# Altium PCB PCB_Rev4.PcbDoc
Units mm, origin at the board's own origin, x right, y up, seen from the top; angles counter-clockwise.
Board outline 39.12 x 29.21 mm, 2 copper layers (Top Layer, Bottom Layer); 64 components, 50 nets, 259 pads, 131 vias.
Unrouted connection lines stored in the file: 37.
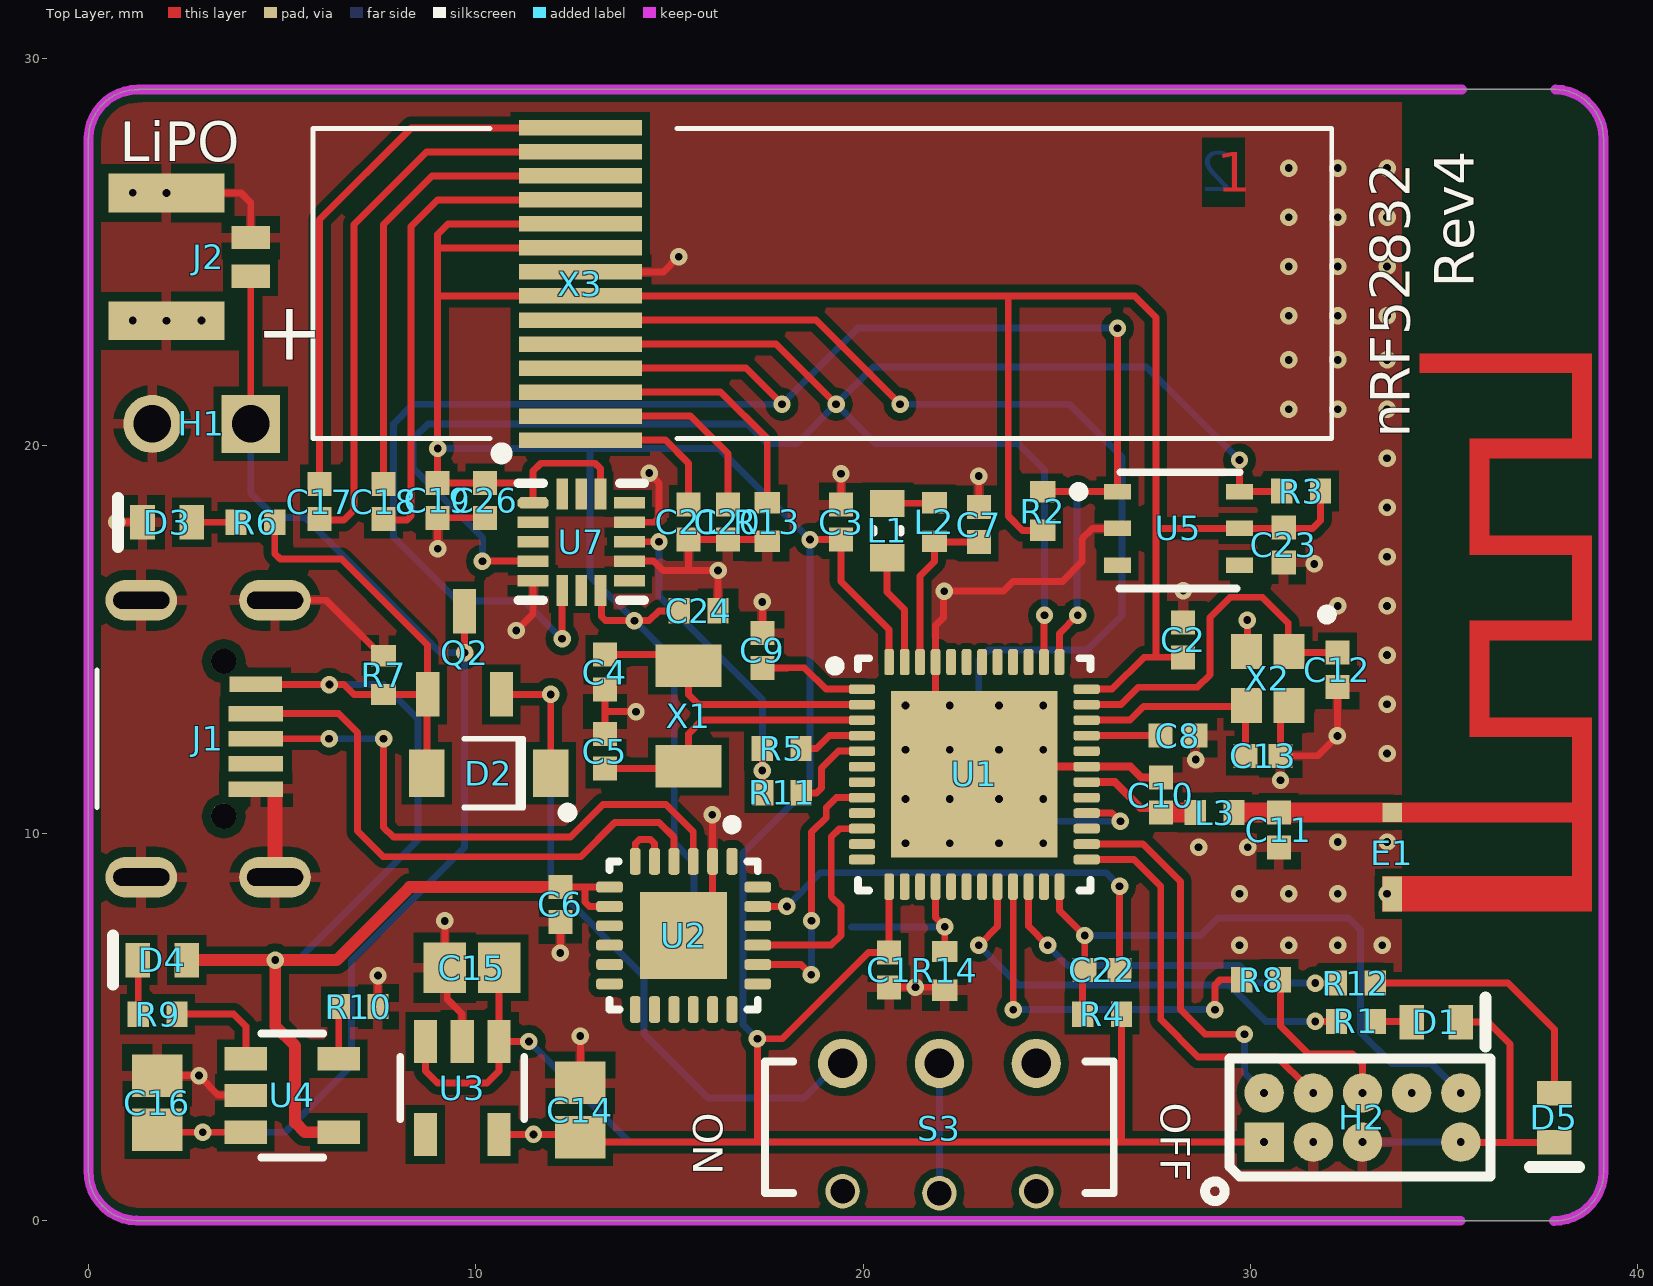
[diagram p0: Top Layer view]
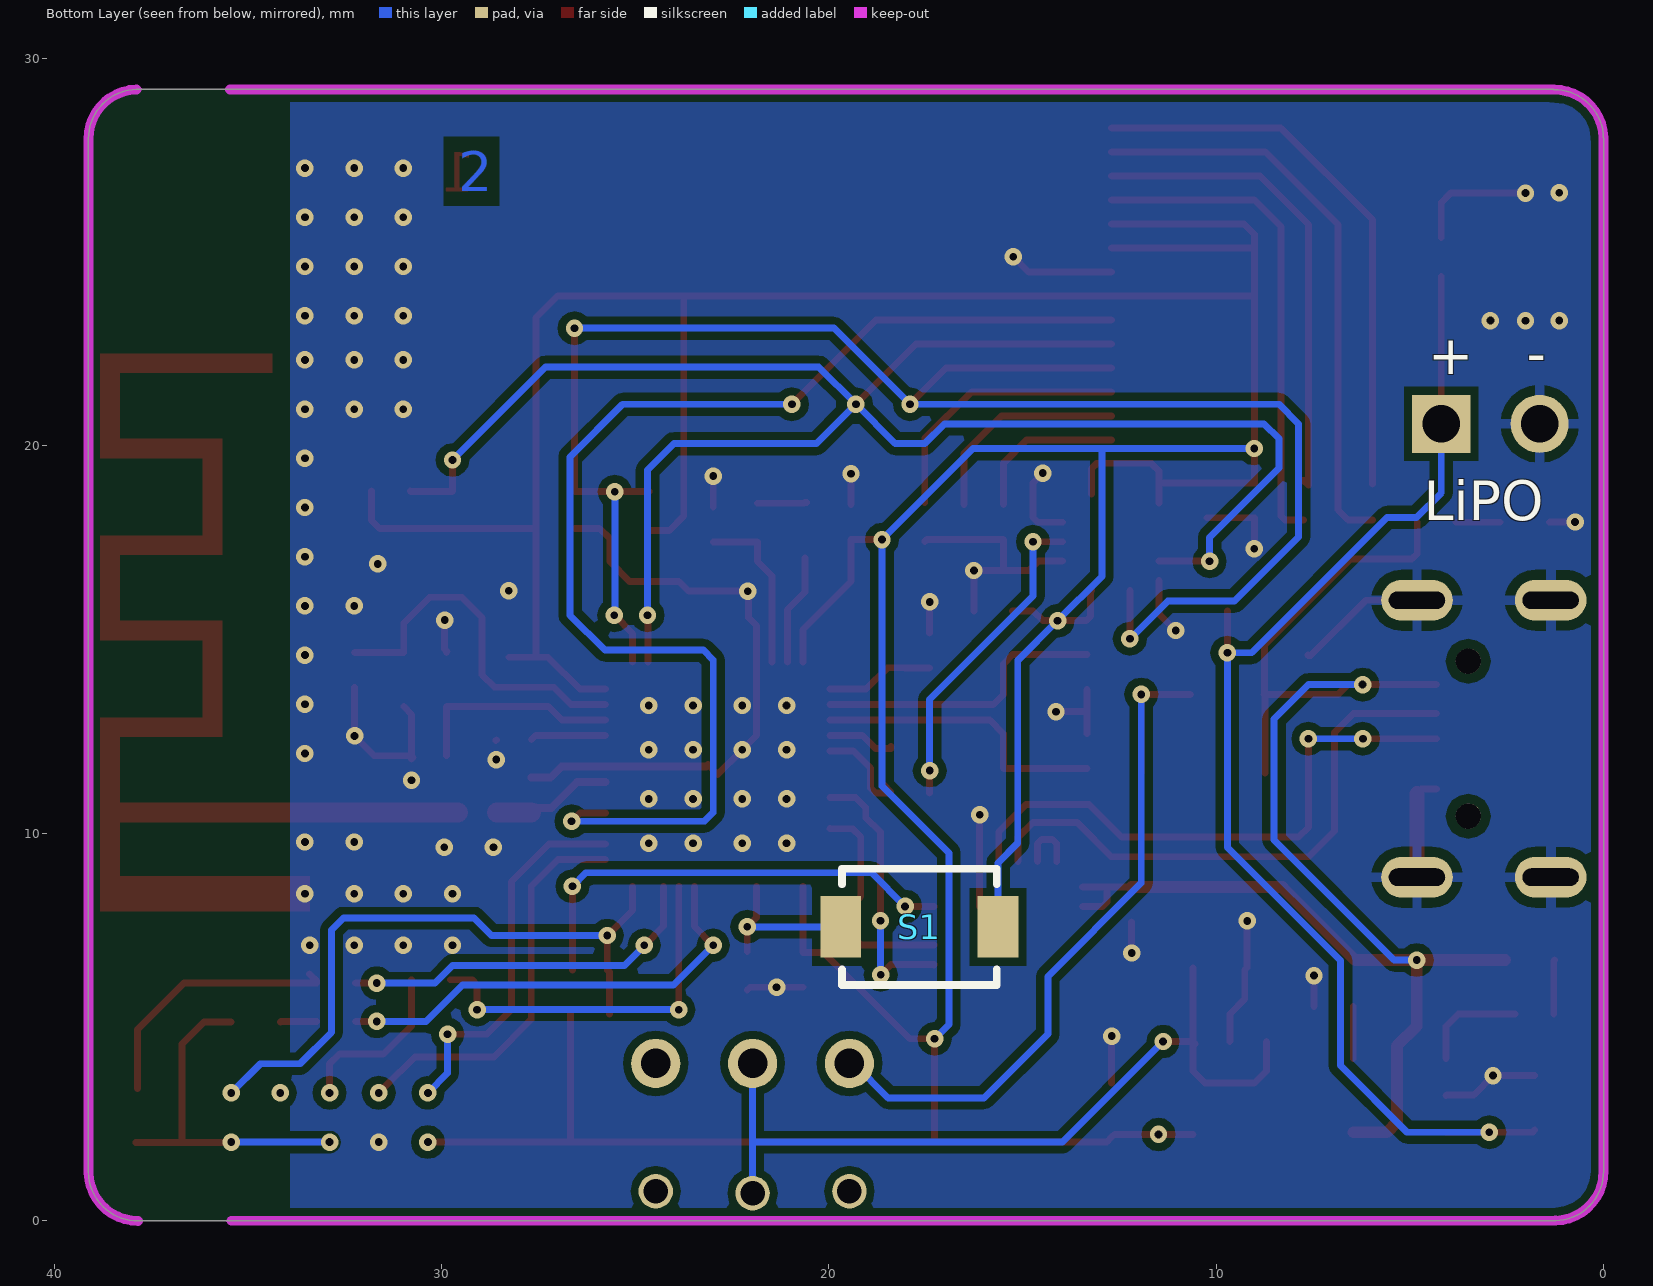
[diagram p1: Bottom Layer view, seen from below]
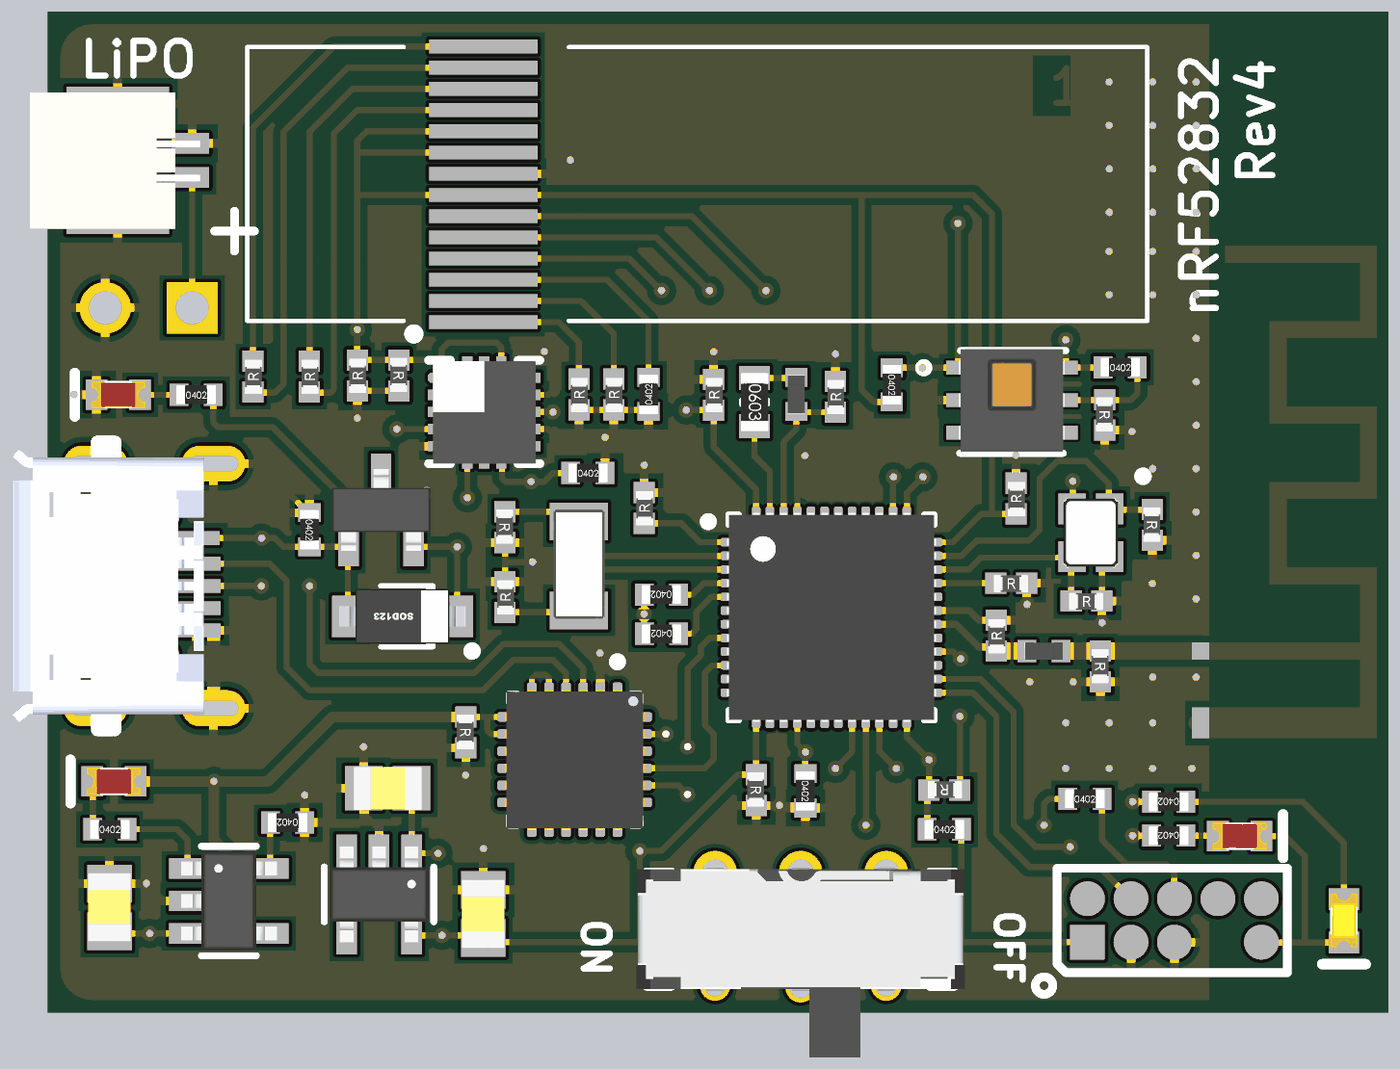
[diagram p2: 3D render of the assembled board from above, using the file's embedded part models]

## Layer stack, top to bottom
Top Solder: solder mask 0.0102, Solder Resist, Dk 3.5
Top Layer: signal copper 0.0356
Dielectric 1: dielectric 0.32, FR-4, Dk 4.8
Bottom Layer: signal copper 0.0356
Bottom Solder: solder mask 0.0102, Solder Resist, Dk 3.5

## Board outline
1.239,0 cw(c1.27,1.27) 0,1.279 0,27.96 0.003,27.96 cw(c1.273,27.93) 1.283,29.199 1.283,29.207 37.877,29.207 37.879,29.207 cw(c37.848,27.937) 39.118,27.927 39.116,27.927 39.116,1.234 cw(c37.846,1.265) 37.837,-0.005 37.834,-0.003

## Design rules (kind name [scope] priority, off if disabled: settings)
Clearance Clearance_U7 [InComponent('U7')] p1: gap=0.191 ignorepadtopadclearanceinfootprint=FALSE
Clearance Clearance_X3 [All vs InComponent('X3')] p2: gap=0.216 ignorepadtopadclearanceinfootprint=FALSE
Clearance Clearance_J1 [All vs InComponent('J1')] p3: gap=0.241 ignorepadtopadclearanceinfootprint=FALSE
Clearance Clearance_U2 [All vs InComponent('U2')] p4: gap=0.203 ignorepadtopadclearanceinfootprint=FALSE
Clearance Clearance_U1 [All vs InComponent('U1')] p5: gap=0.147 ignorepadtopadclearanceinfootprint=FALSE
Clearance [All] p6: gap=0.203 ignorepadtopadclearanceinfootprint=FALSE
MinimumSolderMaskSliver [All] p1: minsoldermaskwidth=0.013
PolygonConnect PolygonConnect_Via [All vs IsVia] p1: connectstyle=Direct reliefconductorwidth=0.254 reliefentries=4 polygonreliefangle="90 Angle" airgapwidth=0.254
PolygonConnect [All] p2: connectstyle=Relief reliefconductorwidth=0.254 reliefentries=4 polygonreliefangle="90 Angle" airgapwidth=0.254
RoutingVias [All] p1: holewidth=0.711 width=1.27 viastyle="Through Hole" minholewidth=0.711 minwidth=1.27 maxholewidth=0.711 maxwidth=1.27
SilkToSilkClearance [All] p1: silktosilkclearance=0.127
SilkToSolderMaskClearance [IsPad] p1: minsilkscreentomaskgap=0.127 clearancetoexposedcopper=TRUE
SolderMaskExpansion [All] p1: expansion=0.102 istentingtop=FALSE
Width [All] p1: maxlimit=2.54 minlimit=0.178 preferedwidth=0.178
27 further rules are at their usual default settings.

## Components (designator, comment, footprint, x,y, rotation, side; value= is the part's Value field where it differs from the comment)
C1 "0.1uF" CAPC1005X56N 20.672,6.476 r270 top
C2 "0.1uF" CAPC1005X56N 28.265,14.996 r90 top
C3 "4.7uF" CAPC1005X56N 19.431,18.035 r90 top
C4 "12pF" CAPC1005X56N 13.335,14.163 r270 top
C5 "12pF" CAPC1005X56N 13.335,12.12 r90 top
C6 "0.1uF" CAPC1005X56N 12.184,8.163 r270 top
C7 "1uF" CAPC1005X56N 22.987,17.973 r90 top
C8 "100pF" CAPC1005X56N 28.127,12.523 r0 top
C9 "0.1uF" CAPC1005X56N 17.399,14.723 r90 top
C10 "0.8pF" CAPC1005X56N 27.686,10.988 r90 top
C11 "DNP" CAPC1005X56N 30.734,10.088 r270 top
C12 "12pF" CAPC1005X56N 32.246,14.223 r270 top
C13 "12pF" CAPC1005X56N 30.326,12.003 r0 top
C14 "10uF" CAPC2012X140N 12.7,2.856 r90 top
C15 "10uF" CAPC2012X140N 9.902,6.531 r180 top
C16 "10uF" CAPC2012X140N 1.778,3.045 r90 top
C17 "1uF" CAPC1005X56N 5.969,18.564 r90 top
C18 "1uF" CAPC1005X56N 7.62,18.564 r90 top
C19 "1uF" CAPC1005X56N 9.017,18.597 r90 top
C20 "4.7uF" CAPC1005X56N 16.51,18.038 r90 top
C21 "2.2uF" CAPC1005X56N 15.494,18.038 r90 top
C22 "0.1uF" CAPC1005X56N 26.172,6.474 r180 top
C23 "0.1uF" CAPC1005X56N 30.861,17.444 r270 top
C24 "0.1uF" RESC1005X40L 15.756,15.745 r0 top
C26 "0.1uF" CAPC1005X56N 10.236,18.597 r270 top
D1 "Red Led" LED1608X55N-RED 34.798,5.127 r180 top
D2 "MBR0520-TP" SOD123 10.338,11.554 r180 top value=MBR0520
D3 "Green Led" LED1608X55N-RED 2.032,18.031 r0 top
D4 "Red Led" LED1608X55N-RED 1.905,6.728 r0 top
D5 "Orange Led" LED1608X55N-YELLOW 37.846,2.654 r90 top
E1 "ANT" TRACE_ANTENNA_2.4GHZ_15.2MM 33.909,10.538 r90 top
H1 "CON2" HDR1X2-EMPTY 2.921,20.571 r180 top
H2 "CON5X2-50MIL" HDR5X2-50MIL-SMT 32.893,2.664 r0 top
J1 "Micro USB" U254-051N-4BH806 4.318,12.443 r270 top
J2 "CON2" JST_Micro_2PIN 4.191,24.881 r270 top
L1 "10uH" RESC1608X06L 20.625,17.816 r270 top
L2 "15nH" INDC1005X40L 21.844,18.039 r270 top
L3 "3.9nH" INDC1005X40L 29.075,10.538 r0 top
Q2 "FDN340P" SOT95P240X110-3N 9.713,14.661 r90 top value="Mosfet P-CH"
R1 "1K" RESC1005X40L 32.723,5.144 r180 top
R2 "2K" RESC1005X40L 24.638,18.321 r270 top
R3 "2K" RESC1005X40L 31.31,18.834 r0 top
R4 "10K" RESC1005X40L 26.17,5.331 r0 top
R5 "0R" RESC1005X40L 17.899,12.189 r180 top
R6 "22K" RESC1005X40L 4.31,18.031 r0 top
R7 "100K" RESC1005X40L 7.62,14.086 r270 top
R8 "0R" RESC1005X40L 30.274,6.22 r0 top
R9 "2K" RESC1005X40L 1.786,5.331 r0 top
R10 "4K" RESC1005X40L 6.977,5.527 r180 top
R11 "0R" RESC1005X40L 17.907,11.046 r180 top
R12 "1K" RESC1005X40L 32.723,6.134 r180 top
R13 "390K" RESC1005X40L 17.526,18.039 r90 top
R14 "10K" RESC1005X40L 22.11,6.451 r270 top
S1 "Pushbutton" TL1015AF160QG 17.665,7.586 r0 bottom
S3 "SWITCH SLIDE" SK-3245D-02-L4 21.971,2.41 r0 top
U1 "NRF52832-QFAA-R" QFN48_NEW 22.872,11.523 r0 top value=nRF52832
U2 "CP2104N" 24-QFN 15.367,7.363 r270 top
U3 "HT7833" SOT95P280X144-5N 9.652,3.426 r270 top
U4 "SL4054ST25P" SOT95P280X144-5N 5.264,3.233 r0 top
U5 "HDC1080DMBT" HDC1080 28.143,17.871 r0 top value=Humidity/Temperature
U7 "LIS3DHTR" QFN3X3_16_1.2 12.725,17.516 r0 top
X1 "32Khz" ECS-.327-12.5-34B 15.494,13.078 r270 top
X2 "32 Mhz" OSC20X16 30.45,13.998 r270 top
X3 "OLED_GLASS 96x16" "OLED_GLASS 96x16" 5.8,20.193 r180 top locked

## Footprints (in the part's own frame and the unit in brackets; to place one, negate y for a bottom-side part, rotate by r counter-clockwise, add the part's x,y. Pads: shape width x height; smd on the part's side, far side on the other; paste and mask are expansions set on the pad)
24-QFN [mm] "24-QFN Exposed Pad (4x4)"
  rrect50% 0.69x0.28 smd: 1(-1.912,1.25) 2(-1.912,0.75) 3(-1.912,0.25) 4(-1.912,-0.25) 5(-1.912,-0.75) 6(-1.912,-1.25) 13(1.913,-1.25) 14(1.913,-0.75) 15(1.913,-0.25) 16(1.913,0.25) 17(1.913,0.75) 18(1.913,1.25)
  rrect50% 0.28x0.69 smd: 7(-1.25,-1.913) 8(-0.75,-1.913) 9(-0.25,-1.913) 10(0.25,-1.913) 11(0.75,-1.913) 12(1.25,-1.913) 19(1.25,1.913) 20(0.75,1.913) 21(0.25,1.913) 22(-0.25,1.913) 23(-0.75,1.913) 24(-1.25,1.913)
  rect 2.25x2.25 smd paste-1.3: 25(0,0)
  silkscreen extent -2.99,-1.91 1.91,1.91, body extent -2.05,-2.04 2.05,2.06, height 1.08
CAPC1005X56N [mm] "Chip Capacitor, 2-Leads, Body 1.0x0.5mm, IPC Medium Density (0402 ceramic)"
  rect 0.62x0.62 smd: 1(-0.45,0) 2(0.45,0)
  body extent -0.55,-0.3 0.55,0.3, height 0.6
CAPC2012X140N [mm] "Chip Capacitor, 2-Leads, Body 2.0x1.3mm, IPC Medium Density (0805 ceramic)"
  rect 1.1x1.3 smd: 1(-0.7,0) 2(0.7,0)
  body extent -1,-0.62 1,0.63, height 1.24
ECS-.327-12.5-34B [mm] "SMT Crystal, 2-Leads, Body 3.2x1.5mm, IPC Medium Density"
  rect 1.1x1.7 smd: 1(-1.25,0) 2(1.35,0)
  body extent -1.6,-0.75 1.6,0.75, height 0.91
HDC1080 [mm] "Temp/Humidity Sensor"
  rect 0.7x0.4 smd mask+0.076: 1(-1.575,0.95) 2(-1.575,0) 3(-1.575,-0.95) 5(1.575,0) 6(1.575,0.95)
  rect 0.7x0.4 smd paste+0 mask+0.076: 4(1.575,-0.95)
  silkscreen extent -2.7,-1.55 1.57,1.45, body extent -1.55,-1.5 1.55,1.5, height 0.85
HDR1X2-EMPTY [mm]
  rect 1.5x1.5 hole 0.965: 1(-1.27,0)
  round 1.5 hole 0.965: 2(1.27,0)
HDR5X2-50MIL-SMT [mil]
  rect 40x40 smd: 1(-100,-25)
  round 40 smd: 2(-100,25) 3(-50,-25) 4(-50,25) 5(0,-25) 6(0,25) 8(50,25) 9(100,-25) 10(100,25)
  silkscreen extent -160,-85 130,60
INDC1005X40L [mm] "Chip Inductor, 2-Leads, Body 1.0x0.5mm, IPC Medium Density (0402)"
  rect 0.55x0.65 smd: 1(-0.5,0) 2(0.5,0)
  body extent -0.56,-0.26 0.56,0.26, height 0.65
JST_Micro_2PIN [mm]
  rect 0.6x1 smd: 1(0.5,0) 2(-0.5,0)
  rect 1x3 smd: ""(-1.65,-2.175) ""(1.65,-2.175)
  body extent -1.99,-4.74 2,0.24, height 2.9
LED1608X55N-RED [mil] "Chip LED RED, 2-Leads, Body 1.6x0.8mm, IPC Medium Density (0603 med)"
  rect 25x35 smd: 1(-25,0) 2(25,0)
  silkscreen extent -50,-25 -50,25, body extent -31,-16 31,16, height 24
LED1608X55N-YELLOW [mil] "Chip LED YELLOW, 2-Leads, Body 1.6x0.8mm, IPC Medium Density (0603 med)"
  rect 25x35 smd: 1(-25,0) 2(25,0)
  silkscreen extent -50,-25 -50,25, body extent -31,-16 32,16, height 24
"OLED_GLASS 96x16" [mm] "OLED_GLASS 96x16"
  rect 3.175x0.4 smd: 1(-6.9,-8.02) 2(-6.9,-7.4) 3(-6.9,-6.78) 4(-6.9,-6.16) 5(-6.9,-5.54) 6(-6.9,-4.92) 7(-6.9,-4.3) 8(-6.9,-3.68) 9(-6.9,-3.06) 10(-6.9,-2.44) 11(-6.9,-1.82) 12(-6.9,-1.2) 13(-6.9,-0.58) 14(-6.9,0.04)
  silkscreen extent -26.3,-8 0,0, body extent -26.3,-8 0,0, height 2
OSC20X16 [mm] "Crystal 2.0mm x 1.60mm 0.5mm height"
  rect 0.9x0.8 smd: 1(-0.7,0.55) 2(-0.7,-0.55) 3(0.7,-0.55) 4(0.7,0.55)
  silkscreen extent -1.78,1.39 -1.52,1.65, body extent -1.02,-0.82 1.03,0.83, height 0.4
QFN3X3_16_1.2 [mm] "QFN3X3_16_1.2"
  oct 0.8x0.3 smd: 1(-1.245,1.016)
  rect 0.8x0.3 smd: 2(-1.245,0.514) 3(-1.245,0.013) 4(-1.245,-0.489) 5(-1.245,-0.991) 9(1.245,-0.991) 10(1.245,-0.489) 11(1.245,0.013) 12(1.245,0.514) 13(1.245,1.016)
  rect 0.3x0.8 smd: 6(-0.495,-1.245) 7(0,-1.245) 8(0.495,-1.245) 14(0.495,1.245) 15(0,1.245) 16(-0.495,1.245)
  silkscreen extent -2.19,-1.5 1.63,2.42, body extent -1.51,-1.5 1.51,1.5, height 0.81
QFN48_NEW [mm] "QFN, 48-Leads, Body 7x7mm, Pitch 0.5mm, IPC Medium Density"
  rrect50% 0.68x0.25 smd: 1(-2.9,2.2) 2(-2.9,1.8) 3(-2.9,1.4) 4(-2.9,1) 5(-2.9,0.6) 6(-2.9,0.2) 7(-2.9,-0.2) 8(-2.9,-0.6) 9(-2.9,-1) 10(-2.9,-1.4) 11(-2.9,-1.8) 12(-2.9,-2.2) 25(2.9,-2.2) 26(2.9,-1.8) 27(2.9,-1.4) 28(2.9,-1) 29(2.9,-0.6) 30(2.9,-0.2) 31(2.9,0.2) 32(2.9,0.6) 33(2.9,1) 34(2.9,1.4) 35(2.9,1.8) 36(2.9,2.2)
  rrect50% 0.25x0.68 smd: 13(-2.2,-2.9) 14(-1.8,-2.9) 15(-1.4,-2.9) 16(-1,-2.9) 17(-0.6,-2.9) 18(-0.2,-2.9) 19(0.2,-2.9) 20(0.6,-2.9) 21(1,-2.9) 22(1.4,-2.9) 23(1.8,-2.9) 24(2.2,-2.9) 37(2.2,2.9) 38(1.8,2.9) 39(1.4,2.9) 40(1,2.9) 41(0.6,2.9) 42(0.2,2.9) 43(-0.2,2.9) 44(-0.6,2.9) 45(-1,2.9) 46(-1.4,2.9) 47(-1.8,2.9) 48(-2.2,2.9)
  rect 4.3x4.3 smd: 49(0,0)
  silkscreen extent -3.72,-3 3,3, body extent -3.05,-3.05 3.05,3.05, height 0.9
RESC1005X40L [mm] "Chip Resistor, 2-Leads, Body 1.0x0.5mm, IPC Medium Density (0402)"
  rect 0.55x0.65 smd: 1(-0.5,0) 2(0.5,0)
  body extent -0.57,-0.27 0.58,0.28, height 0.41
RESC1608X06L [mm] "Chip Resistor, 2-Leads, Body 1.6x0.8mm, IPC High Density (0603 dense)"
  rect 0.7x0.9 smd: 1(-0.7,0) 2(0.7,0)
  silkscreen extent -0.05,-0.35 0.05,0.35, body extent -0.85,-0.4 0.85,0.4, height 0.56
SK-3245D-02-L4 [mm] "Toggle Switches Through Hole"
  round 0.889 hole 0.635: 1(-2.5,-1.65) 2(0,-1.7) 3(2.5,-1.65)
  round 1.27 hole 0.762: 1(-2.5,1.65) 2(0,1.65) 3(2.5,1.65)
  silkscreen extent -4.5,-1.7 4.5,1.7, body extent -4.8,-3.75 4.8,1.8, height 3.56
SOD123 [mil] "Molded Diode, 2-Leads, Body 2.85x1.8mm, IPC Medium Density (SOD123)"
  rect 36x48 smd: 1(-63,0) 2(63,0)
  silkscreen extent -85,-35 25,45, body extent -73,-31 73,31, height 50
SOT95P240X110-3N [mm] "SOT23, 3-Leads, Body 3.0x2.5mm (max), Pitch 0.95mm, IPC Medium Density"
  rect 1.15x0.6 smd: 1(-1.075,0.95) 2(-1.075,-0.95) 3(1.075,0)
  body extent -1.2,-1.45 1.2,1.45, height 0.99
SOT95P280X144-5N [mm] "SOT23, 5-Leads, Body 3.1x3.0mm (max), Pitch 0.95mm, IPC Medium Density (RFMD SOT23-5)"
  rect 1.1x0.6 smd: 1(-1.2,0.95) 2(-1.2,0) 3(-1.2,-0.95) 4(1.2,-0.95) 5(1.2,0.95)
  silkscreen extent -0.8,-1.6 0.8,1.6, body extent -1.4,-1.45 1.4,1.45, height 1.45
TL1015AF160QG [mm] "SWITCH TACTILE SPST-NO 0.05A 12V"
  rect 1.05x1.59 smd: 1(-2.032,0) 2(2.032,0)
  silkscreen extent -2,-1.5 2,1.5, body extent -2.3,-1.5 2.3,1.5, height 2
TRACE_ANTENNA_2.4GHZ_15.2MM [mm] "TRACE_ANTENNA_2.4GHZ_15.2MM"
  rect 0.5x0.5 smd paste+0 mask+0: ANT(0,0.25)
  rect 0.9x0.5 smd paste+0 mask+0: GND(-2.1,0.25)
  Top Layer region: -0.25,0.5 -0.25,-4.4 -1.65,-4.4 -1.65,0.5 -2.55,0.5 -2.55,-4.9 2.45,-4.9 2.45,-2.26 4.45,-2.26 4.45,-4.9 7.15,-4.9 7.15,-2.26 9.15,-2.26 9.15,-4.9 11.85,-4.9 11.85,-0.46 11.35,-0.46 11.35,-4.4 9.65,-4.4 9.65,-1.76 6.65,-1.76 6.65,-4.4 4.95,-4.4 4.95,-1.76 1.95,-1.76 1.95,-4.4 0.25,-4.4 0.25,0.5 -0.25,0.5
U254-051N-4BH806 [mm] "MICRO USB"
  rect 0.4x1.35 smd: 1(-1.4,0)
  rect 0.4x1.4 smd: 2(-0.65,0) 3(0,0) 4(0.65,0) 5(1.3,0)
  oval 1.05x1.85 hole 0.45 slot 1.45 at 90 deg: 6(-3.575,0.5) 6(-3.575,-2.95) 6(3.575,0.5) 6(3.575,-2.95)
  round 0.65 hole 0.65 unplated: ""(-2,-0.825) ""(2,-0.825)
  silkscreen extent -1.78,-4.1 1.77,-4.1, body extent -4.4,-5.39 4.4,0.21, height 2.75

## Part data
C1 C2 C6 C9 C22: library part CAP_0402, "CAP 0.1uF 0402", Part_Footprint=0402, Vendor=LCSC
C3: library part CAP_0402, "CAP 4.7uF 0402", Part_Footprint=0402, Vendor=LCSC
C4 C5 C12 C13: library part CAP_0402, "CAP 12pF 0402", Part_Footprint=0402, Vendor=LCSC
C7: library part CAP_0402, "CAP 1uF 0402", Part_Footprint=0402, Vendor=LCSC
C8: library part CAP_0402, "CAP 100pF 0402", Part_Footprint=0402, Vendor=LCSC
C10: library part CAP_0402, "CAP 0.8pF 0402", Part_Footprint=0402, Vendor=LCSC
C11: library part CAP_0402, "CAP DNP 0402", Part_Footprint=0402, Vendor=LCSC
C14 C15 C16: library part CAP_0805, "CAP 10uF 0805", Part_Footprint=0805
C17 C18 C19: library part CAP_0402, "CAP 0.1uF 16V 0402", Manufacturer=Samsung, Part_Footprint=0402, Part_Number=C29266, Vendor=LCSC
C20: library part CAP_0402, "CAP 4.7uF 16V 0402", Manufacturer=Samsung, Part_Footprint=0402, Part_Number=C318563, Vendor=LCSC
C21: library part CAP_0402, "CAP 2.2uF 16V 0402", Manufacturer=Samsung, Part_Footprint=0402, Part_Number=C170151, Vendor=LCSC
C23: library part CAP_0402, "CAP 0.1uF 0402", Manufacturer=CCTC, PartNumber=TCC0402X5R104M160AT, Vendor=LCSC
C24 C26: library part CAP_0402, "CAP 0.1uF 0402", Manufacturer=CCTC, PartNumber=C344190, Vendor=LCSC
D1 D4: library part LED_0603_SMALL_RED, "LED RED 0603", Part_Footprint=0603
D2: "DIODE SCHOTTKY 20V 500MA SOD-123", Manufacturer=Micro, Part_Footprint=SOD-123, Part_Number=C78746, Vendor=LCSC
D3: library part LED_0603_SMALL_GREEN, "LED Green 0603", Part_Footprint=0603, Vendor=LCSC
D5: library part LED_0603_Orange, "LED Orange 0603", Part_Footprint=0603
E1: library part TRACE_ANTENNA_2.4GHZ_15.2MM, PackageName=TRACE_ANTENNA_2.4GHZ_15.2MM
H1: library part CON2-EMPTY_PAD, "EMPTY SOLDER 2POS"
H2: library part CON5X2_50mil, "JTAG CONN HEADER 5X2POS 50mil\" PADS", PartNumber=PADS
J1: library part U254-051N-4BH806, "CONN RECPT MICRO USB", Manufacturer=XKB, Part_Footprint=SMT, Part_Number=C319170, Vendor=LCSC
J2: library part JST_Micro_CONN_2PIN, "JST MIcro CONN 2POS"
L1: library part LQW15AN3N9D10D, "INDUCTOR 10uH 900mA 0603", Manufacturer=Murata
L2: library part LQW15AN3N9D10D, "INDUCTOR 15nH 900mA 0402", Vendor=LCSC
L3: library part LQW15AN3N9D10D, "INDUCTOR 3.9nH 900mA 0402", Manufacturer=Murata, Part_Number=C412344, Vendor=LCSC
Q2: "MOSFET P-CH 20V 2A SOT-23", Manufacturer="On Semi", Part_Footprint=SOT-23, Part_Number=C75469, Vendor=LCSC
R1 R12: library part RES_0402, "RES 1K 0402", Part_Footprint=0402, Vendor=LCSC
R2 R3 R9: library part RES_0402, "RES 2K 0402", Part_Footprint=0402, Vendor=LCSC
R4 R14: library part RES_0402, "RES 10K 0402", Part_Footprint=0402, Vendor=LCSC
R5 R8 R11: library part RES_0402, "RES 0R 0402", Part_Footprint=0402, Vendor=LCSC
R6: library part RES_0402, "RES 22K 0402", Part_Footprint=0402, Vendor=LCSC
R7: library part RES_0402, "RES 100K 0402", Part_Footprint=0402, Vendor=LCSC
R10: library part RES_0402, "RES 4K 0402", Part_Footprint=0402, Vendor=LCSC
R13: library part RES_0402, "RES 390K 0402", Manufacturer=Uniroyal, Part_Footprint=0402, Part_Number=C25782, Vendor=LCSC
S1: library part TL1015AF160QG, "Switch SMD,3x4x2.5mm", Manufacturer=Xunpu, Part_Footprint=SMD, Part_Number=C455281, Vendor=LCSC
S3: library part SK-3245D-02-L4, "Switch Slide Thu Hole", Manufacturer="KXB Enterprise", PartNumber=SK-3245D-02-L4, Vendor=LCSC
U1: library part nRF52832, "MCU Bluetooth 2.4GHz 48-VFQFN Exposed Pad", Manufacturer="Nordic Semi", ComponentLink1Description=Datasheet, ComponentLink2Description="Supplier link", Part_Footprint=QFN-48, Part_Number=C77540, Vendor=LCSC
U2: library part CP2104-F03-GMR, "IC BRIDGE USB TO UART 24QFN", Manufacturer="Silicon Labs", Part_Footprint=24QFN, Part_Number=C47742, Vendor=LCSC
U3: "IC LDO 3.3V 0.5A SOT23-5", Manufacturer=Holtek, Part_Footprint=SOT23-5, Part_Number=C164106, Vendor=LCSC
U4: "Charger IC Lithium-Ion/Polymer SOT23-5", Manufacturer=Techfuse, PartNumber=C258510, Vendor=LCSC
U5: "Humidity/Temperature Sensor", Manufacturer="Texas Instruments", PartNumber=HDC1080DMBT, Vendor=LCSC
U7: library part E-05-177, "IC ACCEL 2-16G I2C/SPI 16LGA", Manufacturer=STMicro, PartNumber=C15134, Vendor=LCSC
X1: library part ECS-.327-12.5-34B, "CRYSTAL 32.768 KHZ 12.5PF SMD", Manufacturer=ECS, Part_Number=ECS-.327-12.5-34B, Vendor=Digi-Key
X2: library part 32Mhz, "CRYSTAL 32MHZ 12PF SMD", Manufacturer="TXC Corp", Part_Footprint=C409316, Part_Number=9C-12.000MEEJ-T, Vendor=LCSC
X3: "96x16 OLED_GLASS", Part_Number=ER-OLED0.69-1W, Vendor=Buy-Display

## Via types
v1: diameter 0.45, hole 0.2, Top Layer to Bottom Layer, tented both sides, 131 vias

## Nets (pads, with @x,y where several pads share a name; then routed paths per layer and width w, separated by ;. In a path a pad name is that pad's centre, name@x,y a point inside that pad or via, vN(x,y) a via of type N, cw(c..) or ccw(c..) an arc to the next point about the centre after c; other vN are vias at no path point)
+3.3V: C1.1 C2.1 C3.1 C14.1 C19.2 C23.1 C24.1 C26.1 H2.1 R2.2 R3.2 R4.2 S1.1 U1.13 U1.36 U1.48 U3.5 U5.5 U7.1 U7.8 U7.14 X3.5 X3.6 X3.8 | length 138.9
  Top Layer w0.178: U3.5 v1(11.491,2.226) 12.63,2.226 C14.1 12.827,2.029 17.272,2.029 ; U7.1 11.481,18.996 ; X3.6 9.017,25.113 ; X3.5 9.284,25.733 9.017,25.466 9.017,25.113 ; U7.8 13.242,16.25 13.242,15.595 13.347,15.491 v1(14.097,15.491) 14.478,15.491 14.732,15.745 C24.1 ; U7.14 13.221,19.415 13.081,19.555 11.684,19.555 11.481,19.351 11.481,18.996 ; v1(18.629,17.585) C3.1 19.431,16.507 20.672,15.266 U1.48 ; U1.13 C1.1 20.137,6.926 17.907,4.696 v1(17.272,4.696) 17.272,2.029 ; R2.2 24.114,17.821 23.749,18.186 23.749,23.873 ; U1.36 26.426,13.723 27.249,14.546 27.559,14.546 ; R4.2 26.67,2.029 ; C2.1 27.559,14.546 ; v1(30.353,2.029) 26.67,2.029 ; R3.2 31.81,18.082 31.6,17.871 U5.5 27.559,17.871 ; 9.017,23.873 C19.2 C26.1 11.43,19.047 11.481,18.996 ; 9.017,23.873 9.017,25.113 ; 9.017,23.873 X3.8 23.749,23.873 ; 17.272,2.029 26.67,2.029 ; 23.749,23.873 27.007,23.873 27.559,23.321 27.559,17.871 ; 27.559,14.546 27.559,17.871
  Bottom Layer w0.178: v1(9.017,19.936) 12.954,19.936 ; S1.1 15.633,9.237 15.125,9.745 15.125,14.463 v1(14.097,15.491) 12.954,16.634 12.954,19.936 ; v1(17.272,4.696) 16.903,5.065 16.903,9.491 18.629,11.217 v1(18.629,17.585) 16.278,19.936 12.954,19.936
D+: J1.3 U2.3 | length 15.1
  Top Layer w0.178: J1.3 v1(6.214,12.443) ; v1(7.62,12.443) 7.62,10.157 7.874,9.903 12.446,9.903 13.284,10.741 14.91,10.741 15.617,10.034 U2.3
  Bottom Layer w0.178: v1(6.214,12.443) v1(7.62,12.443)
D-: J1.2 U2.4 | length 15
  Top Layer w0.178: J1.2 6.462,13.093 6.95,12.604 6.95,11.334 6.95,10.064 7.62,9.395 12.7,9.395 13.589,10.284 14.732,10.284 15.117,9.899 U2.4
DTR: C22.1 U2.23 | length 12
  Top Layer w0.178: U2.23 v1(18.034,8.113) ; C22.1 v1(26.622,8.633)
  Bottom Layer w0.178: v1(18.034,8.113) 18.904,8.983 26.272,8.983 v1(26.622,8.633)
GND: C1.2 C2.2 C3.2 C4.2 C5.2 C6.2 C7.2 C8.2 C9.2 C10.2 C11.2 C12.2 C13.2 C14.2 C15.2 C16.2 C19.1 C20.1 C21.1 C23.2 C24.2 C26.2 D1.1 D3.1 D5.1 H1.2 H2.3 H2.5 H2.9 J1.5 J1.6 J2. J2.2 R7.1 R10.1 R13.1 R14.2 U1.31 U1.45 U1.49 U2.2 U2.25 U3.2 U4.2 U5.2 U7.5 U7.10 U7.12 X2.2 X2.4 X3.7 | length 73.5
  Top Layer w0.178: v1(0.737,18.038) 1.39,18.038 D3.1 ; C16.2 v1(2.856,3.745) 3.351,3.249 4.047,3.249 U4.2 ; v1(2.016,26.531) 3.946,26.531 4.191,26.286 J2.2 ; J1.5 4.707,11.143 J1.5@4.818,11.032 ; J1.6@4.818,16.018 6.138,16.018 7.57,14.586 R7.1 R7.1@7.639,14.605 ; R10.1 v1(7.477,6.328) ; v1(9.017,17.345) C19.1 C26.2 ; v1(9.202,7.74) C15.2 9.265,6.468 9.265,5.718 9.644,5.338 9.644,4.633 U3.2 ; v1(11.049,15.237) 11.481,15.668 U7.5 ; v1(12.184,6.911) C6.2 ; C14.2 v1(12.7,4.765) ; X3.7 14.844,24.493 v1(15.24,24.889) ; C5.2 C4.2 ; 13.335,13.141 v1(14.137,13.141) ; U7.10 14.592,17.027 14.834,16.786 15.545,16.786 ; U7.12 14.605,18.031 14.732,18.158 14.732,19.047 v1(14.478,19.301) ; U2.25 16.117,8.113 U2.2 16.117,10.466 v1(16.104,10.48) ; C24.2 v1(16.256,16.786) 15.545,16.786 ; v1@17.375,15.999 v1(17.399,15.974) C9.2 ; R13.1 17.477,17.588 C20.1 C21.1 15.494,16.837 15.545,16.786 ; C3.2 v1(19.431,19.286) ; C1.2 v1(21.351,6.026) 22.035,6.026 R14.2 ; v1(22.237,12.158) U1.49 ; C7.2 v1(22.987,19.224) ; U1.49@23.172,11.723 23.122,11.773 U1.49 ; U5.2 25.919,17.871 25.654,17.606 25.654,17.015 25.146,16.507 23.876,16.507 23.622,16.253 v1(22.098,16.253) 22.073,16.227 22.073,15.567 21.872,15.366 21.872,12.523 U1.49 ; C8.2@28.587,12.414 C8.2@28.602,12.399 ; X2.2@29.876,14.673 29.857,14.692 29.921,14.756 v1(29.921,15.507) ; C13.2@30.776,11.918 30.734,11.96 C13.2 ; X2.4@30.976,13.273 30.776,13.073 C13.2 ; C12.2 v1(32.246,12.515) 31.735,12.003 C13.2 ; v1(35.433,2.029) 35.442,2.019 36.322,2.019 D5.1 D5.1@37.897,2.019 ; D1.1 36.135,5.127 36.703,4.559 36.703,2.019
  Top Layer w0.203: U1.49@23.172,11.723 26.904,11.723 27.189,11.438 C10.2
  Top Layer w0.381: J1.6@4.818,8.868 J1.5@4.818,11.032
  Bottom Layer w0.178: v1(32.893,2.029) v1(35.433,2.029)
  other v1: 31.623,2.029 29.718,7.109 30.988,7.109 32.258,7.109 33.401,7.109 29.718,8.442 30.988,8.442 32.258,8.442 33.528,8.442 28.662,9.638 29.932,9.638 21.094,9.745 22.237,9.745 23.507,9.745 24.65,9.745 32.258,9.776 33.528,9.776 21.094,10.888 22.237,10.888 23.507,10.888 24.65,10.888 30.776,11.368 28.587,11.904 33.528,12.062 21.094,12.158 23.507,12.158 24.65,12.158 21.094,13.301 22.237,13.301 23.507,13.301 24.65,13.301 33.528,13.332 33.528,14.602 32.258,15.872 33.528,15.872 28.265,16.265 31.648,16.955 33.528,17.142 33.528,18.412 33.528,19.682 30.988,20.952 32.258,20.952 33.528,20.952 30.988,22.222 32.258,22.222 33.528,22.222 1.143,23.238 2.016,23.231 2.921,23.238 30.988,23.365 32.258,23.365 33.528,23.365 30.988,24.635 32.258,24.635 33.528,24.635 30.988,25.905 32.258,25.905 33.528,25.905 1.143,26.54 30.988,27.175 32.258,27.175 33.528,27.175
INT1: R5.2 R11.2 U7.11 | length 8.9
  Top Layer w0.178: U7.11 v1(14.732,17.529) ; R5.2 v1(17.399,11.621) 17.399,11.054 R11.2
  Bottom Layer w0.178: v1(14.732,17.529) 14.732,16.126 17.399,13.459 v1(17.399,11.621)
LED1: R1.2 U1.20 | length 11.8
  Top Layer w0.178: v1(22.987,7.109) 23.472,7.594 U1.20 ; v1(31.674,5.144) R1.2
  Bottom Layer w0.178: v1(22.987,7.109) 24.012,6.083 29.464,6.083 30.404,5.144 v1(31.674,5.144)
LED2: R12.2 U1.22 | length 9.6
  Top Layer w0.178: U1.22 24.272,7.602 v1(24.765,7.109) ; v1(31.674,6.134) R12.2
  Bottom Layer w0.178: v1(24.765,7.109) 25.282,6.591 29.718,6.591 30.175,6.134 v1(31.674,6.134)
NetC4_1: C4.1 U1.2 X1.1 | length 7.6
  Top Layer w0.178: C4.1 15.259,14.613 15.494,14.378 15.494,13.586 15.748,13.332 15.757,13.323 U1.2
NetC5_1: C5.1 U1.3 X1.2 | length 7.7
  Top Layer w0.178: C5.1 15.486,11.67 15.494,11.678 15.494,12.57 15.847,12.923 U1.3
NetC7_1: C7.1 L2.2 U1.46 | length 4.4
  Top Layer w0.178: U1.46 21.472,16.643 21.844,17.015 21.844,17.523 C7.1
NetC8_1: C8.1 U1.33 | length 1.9
  Top Layer w0.178: U1.33 27.578,12.523 C8.1@27.678,12.423
NetC9_1: C9.1 U1.1 | length 2.8
  Top Layer w0.178: C9.1 18.054,14.273 18.055,14.274 18.489,14.274 19.04,13.723 U1.1
NetC10_1: C10.1 L3.1 U1.30 | length 3.1
  Top Layer w0.203: U1.30 26.501,11.323 27.167,10.657 C10.1@27.567,10.657
  Top Layer w0.229: C10.1@27.567,10.657 C10.1
  Top Layer w0.508: C10.1 L3.1
NetC11_1: C11.1 L3.2
NetC12_1: C12.1 U1.35 X2.1 | length 9.5
  Top Layer w0.178: U1.35 26.661,13.323 27.111,13.773 28.635,13.773 28.956,14.094 28.956,15.575 29.476,16.095 30.316,16.095 30.976,15.435 30.976,14.673 C12.1
NetC13_1: C13.1 U1.34 X2.3 | length 5.5
  Top Layer w0.178: U1.34 26.896,12.923 27.246,13.273 29.876,13.273 C13.1
NetC15_1: C15.1 S3.2 U3.1 U3.3 | length 21.5
  Top Layer w0.178: U3.3 8.702,3.868 9.017,3.553 10.287,3.553 10.602,3.868 U3.1 ; U3.1@10.541,4.565 U3.1 ; C15.1 U3.1 ; v1(11.373,4.626) U3.1
  Bottom Layer w0.178: v1(11.373,4.626) 13.97,2.029 21.971,2.029 ; S3.2@21.971,0.71 21.971,2.029 ; S3.2@21.971,4.06 21.971,2.029
NetC17_1: C17.1 X3.2 | length 15
  Top Layer w0.178: C17.1@5.969,18.089 6.593,18.089 6.858,18.354 6.858,25.72 8.731,27.593 X3.2
NetC17_2: C17.2 X3.1 | length 14.5
  Top Layer w0.178: C17.2 5.969,25.847 8.335,28.213 X3.1
NetC18_1: C18.1 X3.4 | length 12.8
  Top Layer w0.178: C18.1@7.747,18.089 8.227,18.089 8.331,18.193 8.331,25.669 9.015,26.353 X3.4
NetC18_2: C18.2 X3.3 | length 12.5
  Top Layer w0.178: C18.2@7.62,18.989 C18.2@7.747,19.116 ; C18.2 7.62,25.72 8.873,26.973 X3.3
NetC20_2: C20.2 X3.13 | length 5.5
  Top Layer w0.178: X3.13 15.546,20.773 16.51,19.809 C20.2
NetC21_2: C21.2 X3.14 | length 4.1
  Top Layer w0.178: X3.14 14.896,20.153 15.494,19.555 C21.2
NetD1_2: D1.2 R1.1 | length 0.9
  Top Layer w0.178: R1.1 34.147,5.144 D1.2
NetD2_1: D2.1 Q2.2 S3.1 | length 19.2
  Top Layer w0.178: Q2.2 v1(11.938,13.586) D2.1
  Bottom Layer w0.178: v1(11.938,13.586) 11.938,8.716 14.347,6.307 14.347,4.823 15.998,3.172 18.469,3.172 19.357,4.06 S3.1@19.471,4.06
NetD3_2: D3.2 R6.1 | length 1.1
  Top Layer w0.178: D3.2 R6.1
NetD4_1: D4.1 R9.1 | length 1.4
  Top Layer w0.178: D4.1 1.286,6.712 R9.1
NetD5_2: D5.2 R12.1 | length 7
  Top Layer w0.178: R12.1@33.409,6.37 33.223,6.184 R12.1 36.652,6.134 37.846,4.94 D5.2@37.846,3.416
NetH2_6: H2.6 R8.2 | length 4.5
  Top Layer w0.178: R8.2 30.774,5.027 31.496,4.305 32.639,4.305 32.893,4.051 v1(32.893,3.299)
NetL1_1: L1.1 L2.1 | length 1.3
  Top Layer w0.178: L1.1@20.574,18.539 20.625,18.539 20.641,18.523 L2.1@21.844,18.523
NetL1_2: L1.2 U1.47 | length 2.9
  Top Layer w0.178: L1.2@20.622,17.116 20.622,16.23 21.072,15.78 U1.47
NetR5_1: R5.1 U1.4 | length 1.8
  Top Layer w0.178: R5.1@18.399,12.239 R5.1 18.796,12.189 19.13,12.523 U1.4
NetR9_2: R9.2 U4.1 | length 2.7
  Top Layer w0.178: R9.2 3.752,5.331 4.064,5.019 U4.1
NetR10_2: R10.2 U4.5 | length 1.3
  Top Layer w0.178: U4.5 R10.2@6.464,5.527
NetR11_1: R11.1 U1.5 | length 2.6
  Top Layer w0.178: R11.1@18.593,11.255 18.407,11.069 R11.1 18.796,11.046 18.923,11.173 18.923,11.681 19.365,12.123 U1.5
NetR13_2: R13.2 X3.12 | length 7
  Top Layer w0.178: X3.12 16.323,21.393 17.526,20.19 R13.2
NetR14_1: R14.1 S1.2 U1.16 | length 4.2
  Top Layer w0.178: U1.16 21.872,7.824 v1(22.11,7.586) R14.1
  Bottom Layer w0.178: S1.2 v1(22.11,7.586)
NetU2_5: U2.5 U2.6 | length 1.5
  Top Layer w0.178: U2.6 14.119,9.277 14.119,9.739 14.224,9.845 14.513,9.845 14.617,9.741 U2.5
OLED_RESET: U1.28 X3.9 | length 32.4
  Top Layer w0.178: X3.9 18.781,23.253 v1(20.955,21.079) ; U1.28 26.423,10.523 v1@26.633,10.312 ; v1@26.622,10.312 v1@26.633,10.312 ; v1(26.645,10.312) v1@26.633,10.312
  Bottom Layer w0.178: v1(20.955,21.079) 25.323,21.079 26.682,19.72 26.682,15.63 25.781,14.729 23.241,14.729 22.987,14.475 22.987,10.538 23.212,10.312 v1(26.645,10.312)
Reset: C22.2 H2.10 R4.1 U1.24 | length 16.9
  Top Layer w0.178: U1.24 25.072,8.013 v1(25.722,7.363) C22.2 25.67,6.422 R4.1
  Bottom Layer w0.178: v1(25.722,7.363) 28.711,7.363 29.159,7.811 32.537,7.811 32.842,7.506 32.842,4.864 33.655,4.051 34.68,4.051 v1(35.433,3.299)
RXD: U1.10 U2.21 | length 5.8
  Top Layer w0.178: U2.21 19.177,7.113 19.427,7.363 19.427,8.125 19.177,8.375 19.177,9.903 19.393,10.118 19.968,10.118 U1.10
SCL: R3.1 U1.38 U5.6 U7.4 X3.10 | length 48.9
  Top Layer w0.178: v1(10.173,17.027) U7.4 ; X3.10 17.75,22.633 v1(19.304,21.079) ; U1.38 v1@24.672,15.618 ; v1(29.718,19.638) U5.6 30.797,18.821 R3.1
  Bottom Layer w0.178: v1(10.173,17.027) 10.173,17.637 8.382,19.428 8.382,20.19 8.763,20.571 17.018,20.571 17.526,20.063 18.288,20.063 v1(19.304,21.079) ; v1(24.685,15.63) 24.685,19.381 24.003,20.063 20.32,20.063 v1(19.304,21.079) ; v1(29.718,19.638) 27.318,22.038 20.263,22.038 v1(19.304,21.079)
SDA: R2.1 U1.37 U5.1 U7.6 X3.11 | length 45.7
  Top Layer w0.178: v1(12.23,15.021) U7.6 ; X3.11 16.973,22.013 v1(17.907,21.079) ; R2.1 U5.1 v1(26.568,23.042) ; U1.37 25.072,15.163 v1@25.527,15.618
  Bottom Layer w0.178: v1(12.23,15.021) 11.252,15.999 9.525,15.999 7.874,17.65 7.874,20.571 8.382,21.079 v1(17.907,21.079) 19.87,23.042 v1(26.568,23.042) ; v1(25.527,18.818) 25.527,15.643 v1(25.54,15.63)
SWDCLK: H2.4 U1.25 | length 10.4
  Top Layer w0.178: U1.25 26.992,9.323 27.686,8.629 27.686,5.194 28.651,4.229 30.693,4.229 31.463,3.459 v1(31.623,3.299)
SWDIO: H2.2 U1.26 | length 9.8
  Top Layer w0.178: U1.26 27.227,9.723 28.194,8.756 28.194,5.448 28.829,4.813 v1(29.845,4.813)
  Bottom Layer w0.178: v1(29.845,4.813) 29.845,3.807 v1(30.353,3.299)
SWO: R8.1 U1.21 | length 9.8
  Top Layer w0.178: U1.21 23.876,8.619 v1(23.876,5.448) ; v1(29.083,5.448) 29.083,6.083 29.219,6.22 R8.1
  Bottom Layer w0.178: v1(23.876,5.448) v1(29.083,5.448)
TXD: U1.8 U2.20 | length 7
  Top Layer w0.178: U2.20@17.291,6.601 U2.20 18.399,6.613 v1(18.665,6.347) ; v1(18.669,7.744) 18.669,10.03 19.05,10.411 19.05,10.665 19.308,10.923 U1.8
  Bottom Layer w0.178: v1(18.665,6.347) 18.667,6.349 18.667,7.742 v1(18.669,7.744)
VBAT: C16.1 H1.1 J2.1 Q2.3 U4.3 | length 32.6
  Top Layer w0.178: C16.1 1.84,2.283 v1(2.952,2.283) U4.3 ; H1.1 J2.1 ; v1(9.713,14.663) Q2.3
  Bottom Layer w0.178: v1(2.952,2.283) 5.071,2.283 6.792,4.004 6.792,6.717 9.713,9.638 v1@9.713,14.668 ; H1.1 4.191,18.793 4.827,18.157 5.59,18.155 9.083,14.663 v1(9.713,14.663)
VUSB: C6.1 D2.2 D4.2 J1.1 Q2.1 R6.2 R7.2 U2.7 U2.8 U4.4 | length 42.7
  Top Layer w0.178: J1.1 6.601,13.843 6.858,13.586 R7.2 Q2.1@8.75,13.586 ; R6.2 4.81,17.227 4.953,17.084 6.535,17.084 8.75,14.868 Q2.1@8.75,13.586 ; D2.2 8.738,13.56 Q2.1 Q2.1@8.75,13.586 ; C6.1 12.819,8.613 ; U2.8 12.938,8.113 12.819,8.232 12.819,8.613 ; U2.7 12.819,8.613
  Top Layer w0.305: D4.2 v1(4.826,6.728) ; U4.4 5.588,2.283 5.334,2.537 5.334,4.511 4.826,5.019 v1(4.826,6.728) ; C6.1 8.293,8.613 6.408,6.728 v1(4.826,6.728)
  Bottom Layer w0.178: v1(4.826,6.728) 5.406,6.728 8.509,9.831 8.509,12.951 7.62,13.84 v1(6.223,13.84)
pads on no net: E1.ANT E1.GND H2.8 J1. J1.4 S3.3 U1.6 U1.7 U1.9 U1.11 U1.12 U1.14 U1.15 U1.17 U1.18 U1.19 U1.23 U1.27 U1.29 U1.32 U1.39 U1.40 U1.41 U1.42 U1.43 U1.44 U2.1 U2.9 U2.10 U2.11 U2.12 U2.13 U2.14 U2.15 U2.16 U2.17 U2.18 U2.19 U2.22 U2.24 U3.4 U5.3 U5.4 U7.2 U7.3 U7.7 U7.9 U7.13 U7.15 U7.16
copper on no net: | length 4.1
  Top Layer w0.508: 29.575,10.538 33.659,10.538
  other v1: 34.163,3.299

## Polygon pours and split planes (outlines as drawn)
GND on Bottom Layer "GND_L02_P000" (solid, pour order 0): 36.703,-0.003 36.703,29.207 0,29.207 0,-0.003
GND on Top Layer "NONET_L-01_P-001" (solid, pour order 1): 0,29.207 0,0.124 0.127,-0.003 33.909,-0.003 33.909,29.207

## Keep-outs
Keep-Out Layer:
  lines w0.254: 0,27.96 0,1.279 ccw(c1.27,1.27) 1.239,0 ; 0.003,27.96 cw(c1.273,27.93) 1.283,29.199 ; 1.239,-0.003 35.424,-0.003 ; 1.283,29.207 35.466,29.207 ; 37.834,-0.005 ccw(c37.844,1.265) 39.114,1.234 39.114,27.927 ; 37.877,29.207 cw(c37.846,27.937) 39.116,27.927

## Other copper
Top Layer:
  text "1" at 29.134,26.558 h1.02
Bottom Layer:
  pour cut-out: 33.909,29.207 33.909,-0.003 35.941,-0.003 36.703,0.759 36.703,28.318 35.814,29.207
  text "2" at 29.566,26.583 h1.02

## Silkscreen, mask and mechanical layers (free items; w line width, h text height)
Top Overlay:
  text "LiPO" at 0.813,27.352 h1.02
  text "Rev4" at 35.763,24.092 h1.02 r90
  text "+" at 4.318,22.222 h1.52
  text "nRF52832" at 34.112,20.208 h1.02 r90
Bottom Overlay:
  text "-" at 1.981,21.892 h1.02
  text "+" at 4.521,21.849 h1.02
  text "LiPO" at 4.648,18.081 h1.02
Mechanical 1:
  lines w0.254: 0,27.96 0,1.279 ccw(c1.27,1.27) 1.239,0 ; 0.003,27.96 cw(c1.273,27.93) 1.283,29.199 ; 1.239,-0.003 37.834,-0.003 ; 1.283,29.207 37.877,29.207 ; 37.837,-0.005 ccw(c37.846,1.265) 39.116,1.234 39.116,27.927 ; 37.879,29.207 cw(c37.848,27.937) 39.118,27.927

## Dimensions
35.466,29.207 to 35.424,-0.003 on Drill Drawing
0,27.96 to 39.114,27.927 on Drill Drawing

## Text inside footprints (layer, text, board x,y; h text height)
S3: Top Overlay "ON" at 15.621,2.791 h0.76 r270; Top Overlay "OFF" at 27.686,3.045 h0.76 r270